# Altium PCB PCBmain.PcbDoc
Units mil, origin at the board's own origin, x right, y up, seen from the top; angles counter-clockwise.
Board outline 4165 x 1710 mil, 2 copper layers (Top Layer, Bottom Layer); 39 components, 34 nets, 220 pads, 0 vias.
Unrouted connection lines stored in the file: 106.
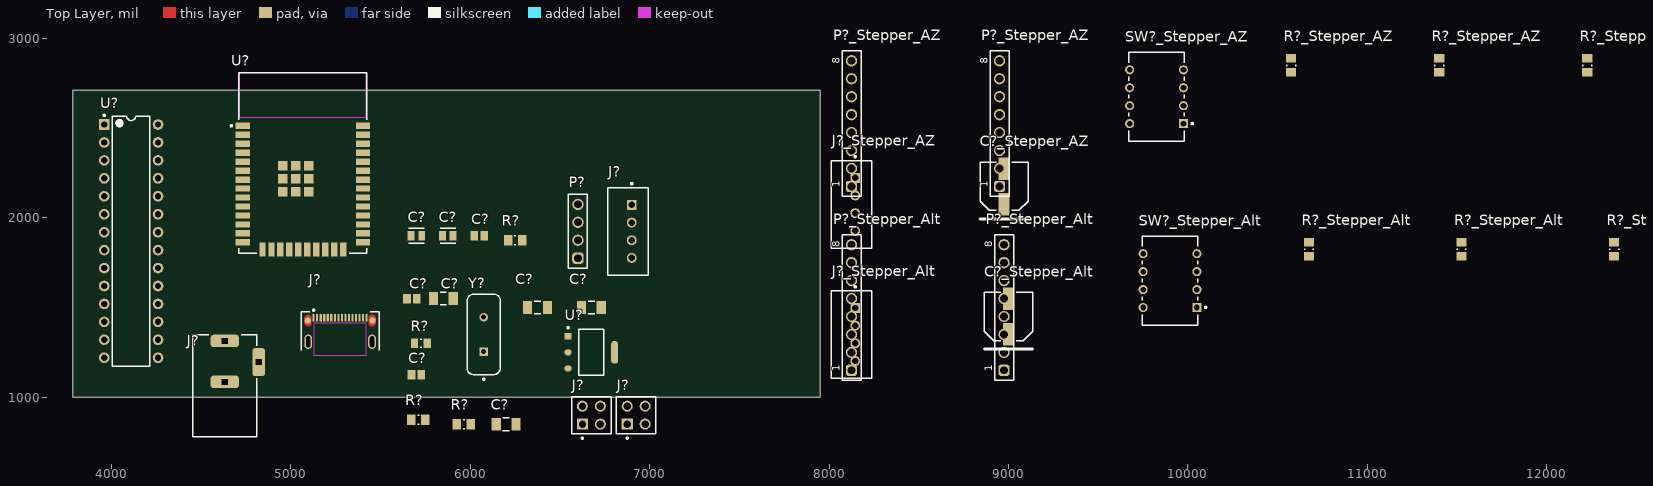
[diagram p0: Top Layer view]
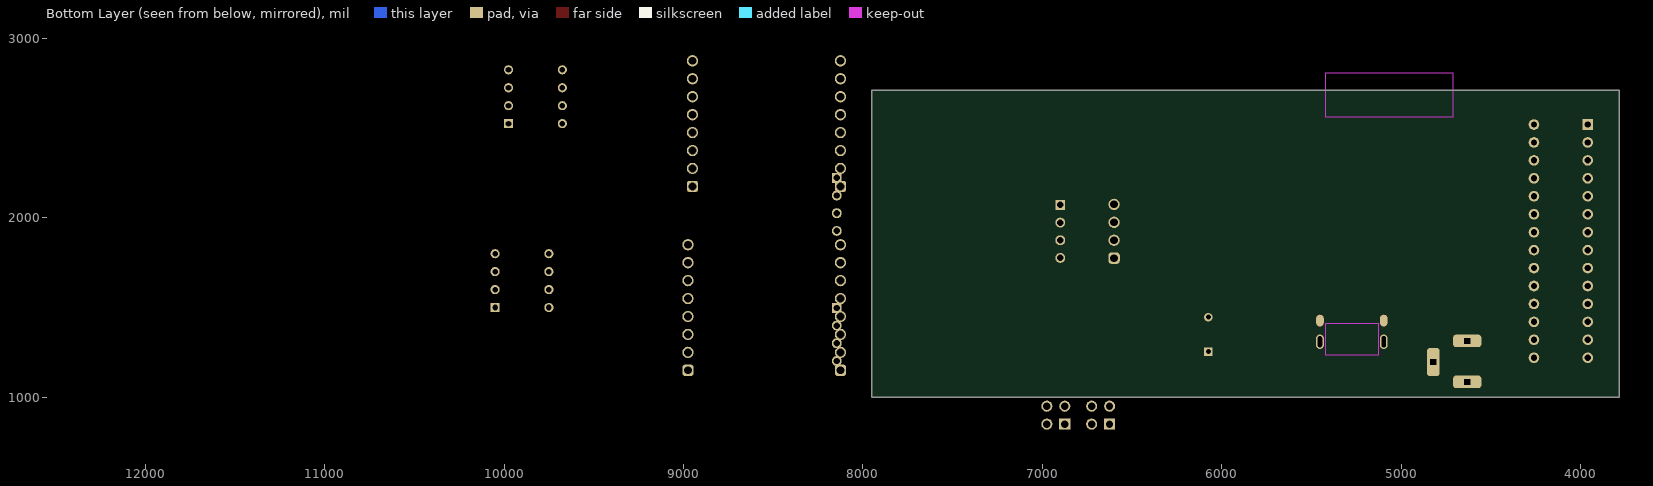
[diagram p1: Bottom Layer view, seen from below]

## Layer stack, top to bottom
Top Solder: solder mask 0.4, Solder Resist, Dk 3.5
Top Layer: signal copper 1.4
Dielectric 1: dielectric 12.6, FR-4, Dk 4.8
Bottom Layer: signal copper 1.4
Bottom Solder: solder mask 0.4, Solder Resist, Dk 3.5

## Board outline
3785,1000 7950,1000 7950,2710 3785,2710

## Design rules (kind name [scope] priority, off if disabled: settings)
BoardOutlineClearance [All] p1: gap=7.87 ignorepadtopadclearanceinfootprint=FALSE
Clearance [All] p1: gap=5 ignorepadtopadclearanceinfootprint=FALSE except(9.84: Arc-Hole Track-Hole SMDPad-Hole THPad-Hole Via-Hole Fill-Hole Poly-Hole Region-Hole Text-Hole)
ComponentClearance [All] p1: gap=5 collisioncheckmode=3 verticalgap=5 showdistances=TRUE
DiffPairsRouting [All] p1: maxlimit=10 minlimit=5 mostfreqgap=5 toplayer_minwidth=5 toplayer_maxwidth=1000 toplayer_prefwidth=5 bottomlayer_minwidth=5 bottomlayer_maxwidth=1000 bottomlayer_prefwidth=5 maxuncoupledlength=500
Height [All] p1: minheight=0 maxheight=71497.94 prefheight=500
HoleSize [All] p1: absolutevalues=TRUE maxlimit=248.03 minlimit=11.81 maxpercent=80.000 minpercent=20.000
HoleToHoleClearance [All] p1: gap=9.84 allowstackedmicrovias=FALSE
MinimumAnnularRing [All] p1: minimumring=3
MinimumSolderMaskSliver [All] p1: minsoldermaskwidth=0
PlaneClearance [All] p1: clearance=5
PlaneConnect PlaneConnectPowerPads [InPadClass('PowerPads')] p1: planeconnectstyle=Direct reliefexpansion=20 reliefentries=4 reliefconductorwidth=10 reliefairgap=10
PlaneConnect [All] p2: pad.planeconnectstyle=Relief pad.reliefexpansion=11.81 pad.reliefentries=4 pad.reliefconductorwidth=5 pad.reliefairgap=5 via.planeconnectstyle=Direct via.reliefexpansion=11.81 via.reliefentries=4 via.reliefconductorwidth=5 via.reliefairgap=5
PolygonConnect PolygonConnectPowerPads [All vs (InPadClass('PowerPads'))] p1: connectstyle=Direct reliefconductorwidth=10 reliefentries=4 polygonreliefangle="90 Angle" airgapwidth=10
PolygonConnect [All] p2: thpad.connectstyle=Relief thpad.reliefconductorwidth=5 thpad.reliefentries=4 thpad.polygonreliefangle="90 Angle" thpad.airgapwidth=5 smdpad.connectstyle=Relief smdpad.reliefconductorwidth=5 smdpad.reliefentries=4 smdpad.polygonreliefangle="90 Angle" smdpad.airgapwidth=5 via.connectstyle=Direct via.reliefconductorwidth=5 via.reliefentries=4 via.polygonreliefangle="90 Angle" via.airgapwidth=5
RoutingVias [All] p1: holewidth=11.81 width=23.62 viastyle="Through Hole" minholewidth=11.81 minwidth=23.62 maxholewidth=23.62 maxwidth=259.84
SilkToSilkClearance [All] p1: silktosilkclearance=0
SilkToSolderMaskClearance [IsPad] p1: minsilkscreentomaskgap=5 clearancetoexposedcopper=TRUE
SolderMaskExpansion [All] p1: expansion=2.95 istentingtop=FALSE
Width [All] p1: maxlimit=1000 minlimit=5 preferedwidth=5 minimp=50.000000 maximp=50.000000 favimp=50.000000
20 further rules are at their usual default settings.

## Classes and differential pairs
channel class Stepper_control: Stepper_Alt Stepper_AZ
component class Stepper_AZ: C?_Stepper_AZ J?_Stepper_AZ P?_Stepper_AZ R?_Stepper_AZ SW?_Stepper_AZ
component class Stepper_Alt: C?_Stepper_Alt J?_Stepper_Alt P?_Stepper_Alt R?_Stepper_Alt SW?_Stepper_Alt
component class Sensors: J? P?
component class Power: C? J? R? U?
component class Asynchronous: C? J? R? U?
component class Synchronous: C? R? U1 U? Y?

## Components (designator, comment, footprint, x,y, rotation, side; value= is the part's Value field where it differs from the comment)
C? "1206YD106KAT2A" FP-1206-L_3_2_0_2-W_1_6_0-IPC_B 6200,850 r0 top
C? "C0805C220K3GACTU" FP-C0805C-DN-MFG 5700,1900 r0 top value="22 pF"
C? "C0805C105K4PACTU" CAPC2013X145X50LL20T25 5700,1125 r0 top
C? "C0805C220K3GACTU" FP-C0805C-DN-MFG 5875,1900 r0 top value="22 pF"
C? "08055F104KAT2A" CAPC2013X140X50LL20T25 6050,1900 r0 top value=100nF
C? "1206YD106KAT2A" FP-1206-L_3_2_0_2-W_1_6_0-IPC_B 6375,1500 r0 top
C? "08055F104KAT2A" CAPC2013X140X50LL20T25 5675,1550 r0 top value=100nF
C? "1206YD106KAT2A" FP-1206-L_3_2_0_2-W_1_6_0-IPC_B 5850,1550 r0 top
C? "1206YD106KAT2A" FP-1206-L_3_2_0_2-W_1_6_0-IPC_B 6675,1500 r0 top
C?_Stepper_Alt "EEEFK1E101XP" PNSC-FK-V-D8_V 9000,1450 r90 top (schematic designator C?)
C?_Stepper_AZ "EEEFK1E101XP" PNSC-FK-V-D8_V 8975,2175 r90 top (schematic designator C?)
J? "B4B-XH-A(LF)(SN)" FP-B4B-XH-A_LF_SN-MFG 6879.33,1924.21 r90 top
J? "PEC02DABN" FP-PEC02DABN-MFG 6925,900 r0 top
J? "PEC02DABN" FP-PEC02DABN-MFG 6675,900 r0 top
J? "694106301002" 694106301002 4632.05,1064.09 r0 top
J? "213083-0005" FP-2130830005-MFG 5275,1303.35 r0 top
J?_Stepper_Alt "B4B-XH-A(LF)(SN)" FP-B4B-XH-A_LF_SN-MFG 8125,1350 r90 top (schematic designator J?)
J?_Stepper_AZ "B4B-XH-A(LF)(SN)" FP-B4B-XH-A_LF_SN-MFG 8125,2075 r90 top (schematic designator J?)
P? "61300411121" 61300411121 6600,1925 r90 top
P?_Stepper_Alt "61300811121" 61300811121 8975,1500 r90 top (schematic designator P?)
P?_Stepper_Alt "61300811121" 61300811121 8125,1500 r90 top (schematic designator P?)
P?_Stepper_AZ "61300811121" 61300811121 8125,2525 r90 top (schematic designator P?)
P?_Stepper_AZ "61300811121" 61300811121 8950,2525 r90 top (schematic designator P?)
R? "RC0805FR-0710KL" RESC2013X60X35NL10T20 5725,1300 r0 top
R? "RC0805FR-071KL" RESC2013X60X35ML10T20 5964.37,850 r0 top
R? "RC0805FR-071KL" RESC2013X60X35ML10T20 5710.63,875 r0 top
R? "RC0805FR-071KL" RESC2013X60X35ML10T20 6250,1875 r0 top
R?_Stepper_Alt "RC0805FR-071KL" RESC2013X60X35ML10T20 12375,1825 r90 top (schematic designator R?)
R?_Stepper_Alt "RC0805FR-071KL" RESC2013X60X35ML10T20 11525,1825 r90 top (schematic designator R?)
R?_Stepper_Alt "RC0805FR-071KL" RESC2013X60X35ML10T20 10675,1825 r90 top (schematic designator R?)
R?_Stepper_AZ "RC0805FR-071KL" RESC2013X60X35ML10T20 12225,2850 r90 top (schematic designator R?)
R?_Stepper_AZ "RC0805FR-071KL" RESC2013X60X35ML10T20 11400,2850 r90 top (schematic designator R?)
R?_Stepper_AZ "RC0805FR-071KL" RESC2013X60X35ML10T20 10575,2850 r90 top (schematic designator R?)
SW?_Stepper_Alt "1825360-3" FP-1825360-3-MFG 9900,1650 r90 top (schematic designator SW?)
SW?_Stepper_AZ "1825360-3" FP-1825360-3-MFG 9825,2675 r90 top (schematic designator SW?)
U? "AMS1117-3.3" FP-AMS1117-IPC_C 6675,1250 r0 top
U? "ATmega328P-PU" 28P3 4110,1870 r0 top
U? "ESP32-WROOM-32" FP-ESP32-WROOM-32-MFG 5067.13,2305.94 r0 top
Y? "FOXSLF/160-20" FOX-FOXSLF160-20 6075,1350 r90 top

## Footprints (in the part's own frame and the unit in brackets; to place one, negate y for a bottom-side part, rotate by r counter-clockwise, add the part's x,y. Pads: shape width x height; smd on the part's side, far side on the other; paste and mask are expansions set on the pad)
28P3 [mm] "28-Pin Plastic Dual In-Line Package (PDIP)"
  rect 1.5x1.5 hole 0.9: 1(-3.81,16.51)
  round 1.5 hole 0.9: 2(-3.81,13.97) 3(-3.81,11.43) 4(-3.81,8.89) 5(-3.81,6.35) 6(-3.81,3.81) 7(-3.81,1.27) 8(-3.81,-1.27) 9(-3.81,-3.81) 10(-3.81,-6.35) 11(-3.81,-8.89) 12(-3.81,-11.43) 13(-3.81,-13.97) 14(-3.81,-16.51) 15(3.81,-16.51) 16(3.81,-13.97) 17(3.81,-11.43) 18(3.81,-8.89) 19(3.81,-6.35) 20(3.81,-3.81) 21(3.81,-1.27) 22(3.81,1.27) 23(3.81,3.81) 24(3.81,6.35) 25(3.81,8.89) 26(3.81,11.43) 27(3.81,13.97) 28(3.81,16.51)
  silkscreen extent -3.93,-17.7 2.65,17.93, body extent -3.6,-17.65 3.6,17.65, height 4.58
61300411121 [mm] "Pin Header, pitch 2.54 mm, THT, Vertical, single row, 4p"
  rrect50% 1.6x1.6 hole 1.1: 1(-3.81,0)
  round 1.6 hole 1.1: 2(-1.27,0) 3(1.27,0) 4(3.81,0)
  silkscreen extent -5.23,-1.35 5.23,1.35, body extent -5.08,-1.27 5.08,1.27, height 8.57
61300811121 [mm] "Pin Header, pitch 2.54 mm, THT, Vertical, single row, 8p"
  rrect50% 1.6x1.6 hole 1.1: 1(-8.89,0)
  round 1.6 hole 1.1: 2(-6.35,0) 3(-3.81,0) 4(-1.27,0) 5(1.27,0) 6(3.81,0) 7(6.35,0) 8(8.89,0)
  silkscreen extent -10.31,-1.35 10.31,1.35, body extent -10.16,-1.27 10.16,1.27, height 8.57
694106301002 [mm] "DC Power Jack Right Angled(6.4)"
  rrect50% 4x1.8 hole 0.8 square: 1(0,6.35) 2(0,0.55)
  rrect50% 1.8x4 hole 0.8 square: 3(4.8,3.35)
  silkscreen extent -4.5,-7.25 4.5,7.25, body extent -4.5,-7.25 5,7.25, height 10.75
CAPC2013X140X50LL20T25 [mm] "Chip Capacitor, 2-Leads, Body 2.00x1.25mm, IPC High Density"
  rect 1.1x1.35 smd: 1(-0.7,0) 2(0.7,0)
  body extent -1.1,-0.72 1.1,0.72, height 1.4
CAPC2013X145X50LL20T25 [mm] "Chip Capacitor, 2-Leads, Body 2.00x1.25mm, IPC High Density"
  rect 1.1x1.35 smd: 1(-0.7,0) 2(0.7,0)
  body extent -1.1,-0.72 1.1,0.72, height 1.45
FOX-FOXSLF160-20 [mm] "THD, 2-Leads, Body 11.35x4.65mm"
  rect 1.2x1.2 hole 0.7: 1(-2.44,0)
  round 1.2 hole 0.7: 2(2.44,0)
  silkscreen extent -6.45,-2.32 5.68,2.32, body extent -5.67,-2.32 5.68,2.33, height 3.6
FP-1206-L_3_2_0_2-W_1_6_0-IPC_B [mil]
  rect 51.36x71.11 smd paste+0 mask+0: 1(-55.15,0) 2(55.15,0)
  silkscreen extent -18,-36 18,36, body extent -91,-45 91,45, height 10
FP-1825360-3-MFG [mm]
  rect 1.29x1.29 hole 0.79 paste-2539.97 mask+0: 1(-3.81,-3.81)
  round 1.29 hole 0.79 paste-2539.97 mask+0: 2(-1.27,-3.81) 3(1.27,-3.81) 4(3.81,-3.81) 5(3.81,3.81) 6(1.27,3.81) 7(-1.27,3.81) 8(-3.81,3.81)
  silkscreen extent -6.29,-5.16 6.29,3.9, body extent -6.4,-4.55 6.4,4.55, height 0.25
FP-2130830005-MFG [mm]
  round 0.9 smd paste-1000 mask+0: 1(-4.57,3.15) 2(4.57,3.15)
  rrect100% 1.1x1.65 smd far side paste-1000 mask+0: 1(-4.52,3.15) 2(4.52,3.15)
  rrect100% 1.1x2.05 hole 1.55 slot 0.6 at 0 deg paste-2539.97 mask+0: 3(-4.52,0.15) 4(4.52,0.15)
  rect 0.3x1 smd paste+0 mask+0: A1(-3.75,3.55) A4(-2.75,3.55) A5(-1.75,3.55) A6(-0.75,3.55) A7(0.75,3.55) A8(1.75,3.55) A9(2.75,3.55) A12(3.75,3.55) B1(3.25,3.55) B4(2.25,3.55) B5(1.25,3.55) B6(0.25,3.55) B7(-0.25,3.55) B8(-1.25,3.55) B9(-2.25,3.55) B12(-3.25,3.55)
  Top Layer region: 5.07,3.425 5.001,3.691 4.812,3.891 4.549,3.974 4.28,3.919 4.07,3.741 4.07,3.741 4.07,2.559 4.28,2.381 4.549,2.326 4.812,2.409 5.001,2.609 5.07,2.875 5.07,2.875
  Top Layer region: -5.07,3.425 -5.001,3.691 -4.812,3.891 -4.549,3.974 -4.28,3.919 -4.07,3.741 -4.07,3.741 -4.07,2.559 -4.28,2.381 -4.549,2.326 -4.812,2.409 -5.001,2.609 -5.07,2.875 -5.07,2.875
  Keep-Out Layer region: -3.7,-1.745 3.7,-1.745 3.7,2.755 -3.7,2.755
  silkscreen extent -5.53,-1.07 5.53,4.75, body extent -5.33,-4.18 5.33,4.18, height 0.25
FP-AMS1117-IPC_C [mm]
  rect 1.004x0.872 smd paste+0 mask+0: 1(-3.295,2.29)
  rrect100% 1.004x0.872 smd paste+0 mask+0: 2(-3.295,0) 3(-3.295,-2.29)
  rrect87% 1.004x3.182 smd paste+0 mask+0: 4(3.295,0)
  silkscreen extent -3.42,-3.25 1.75,3.62, body extent -3.9,-3.35 3.9,3.35, height 0.25
FP-B4B-XH-A_LF_SN-MFG [mm]
  rect 1.4x1.4 hole 0.9 paste-2539.97 mask+0: 1(3.75,-0.525)
  round 1.4 hole 0.9 paste-2539.97 mask+0: 2(1.25,-0.525) 3(-1.25,-0.525) 4(-3.75,-0.525)
  silkscreen extent -6.2,-2.88 6.87,2.88, body extent -6.3,-2.98 6.3,2.98, height 0.25
FP-C0805C-DN-MFG [mm]
  rect 0.95x1.35 smd paste+0 mask+0: 1(-0.75,0) 2(0.75,0)
  silkscreen extent -1.1,-1.07 1.1,1.07, body extent -1.4,-0.85 1.4,0.85, height 0.25
FP-ESP32-WROOM-32-MFG [mm]
  rect 2x0.9 smd paste+0 mask+0: 1(-8.5,5.26) 2(-8.5,3.99) 3(-8.5,2.72) 4(-8.5,1.45) 5(-8.5,0.18) 6(-8.5,-1.09) 7(-8.5,-2.36) 8(-8.5,-3.63) 9(-8.5,-4.9) 10(-8.5,-6.17) 11(-8.5,-7.44) 12(-8.5,-8.71) 13(-8.5,-9.98) 14(-8.5,-11.25) 25(8.5,-11.25) 26(8.5,-9.98) 27(8.5,-8.71) 28(8.5,-7.44) 29(8.5,-6.17) 30(8.5,-4.9) 31(8.5,-3.63) 32(8.5,-2.36) 33(8.5,-1.09) 34(8.5,0.18) 35(8.5,1.45) 36(8.5,2.72) 37(8.5,3.99) 38(8.5,5.26)
  rect 0.9x2 smd paste+0 mask+0: 15(-5.715,-12.25) 16(-4.445,-12.25) 17(-3.175,-12.25) 18(-1.905,-12.25) 19(-0.635,-12.25) 20(0.635,-12.25) 21(1.905,-12.25) 22(3.175,-12.25) 23(4.445,-12.25) 24(5.715,-12.25)
  rect 1.33x1.33 smd paste+0 mask+0: 39(-2.835,-4.075) 39(-2.835,-2.24) 39(-2.835,-0.405) 39(-1,-4.075) 39(-1,-2.24) 39(-1,-0.405) 39(0.835,-4.075) 39(0.835,-2.24) 39(0.835,-0.405)
  Keep-Out Layer region: -9,6.45 9,6.45 9,12.75 -9,12.75
  Keep-Out Layer region: -9,6.45 9,6.45 9,12.75 -9,12.75
  silkscreen extent -10.25,-12.8 9.05,12.8, body extent -9.6,-13.35 9.6,12.9, height 0.25
FP-PEC02DABN-MFG [mm]
  rect 1.57x1.57 hole 1.02 paste-2539.97 mask+0: 1(-1.27,-1.27)
  round 1.57 hole 1.02 paste-2539.97 mask+0: 2(-1.27,1.27) 3(1.27,-1.27) 4(1.27,1.27)
  silkscreen extent -2.8,-3.37 2.8,2.61, body extent -2.9,-2.71 2.9,2.71, height 0.25
PNSC-FK-V-D8_V [mm] "CAPAE, 2-Leads, Body 6.80x6.80mm"
  rect 3.2x1.6 smd: 1(-2.5,0) 2(2.5,0)
  silkscreen extent -4.6,-3.4 3.4,3.4, body extent -3.9,-3.4 3.9,3.4, height 8
RESC2013X60X35ML10T20 [mm] "Chip Resistor, 2-Leads, Body 2.1x1.35mm, IPC Low Density"
  rect 1.2x1.45 smd: 1(-1,0) 2(1,0)
  silkscreen extent -0.1,-0.63 0.1,0.63, body extent -1.05,-0.68 1.05,0.67, height 0.6
RESC2013X60X35NL10T20 [mm] "Chip Resistor, 2-Leads, Body 2.1x1.35mm, IPC Medium Density"
  rect 1x1.35 smd: 1(-0.9,0) 2(0.9,0)
  silkscreen extent -0.1,-0.58 0.1,0.58, body extent -1.05,-0.68 1.05,0.67, height 0.6

## Part data
C? C? C? C?: library part CMP-04427-000082-1, "General Purpose Ceramic Capacitor, 1206, 10uF, 10%, X5R, 15%, 16V", Capacitance=10uF, Case Code (Imperial)=1206, Case Code (Metric)=3216, Dielectric=X5R, Max Operating Temperature=85°C, Min Operating Temperature=-55°C, Package Quantity=1, Tolerance=10%, Voltage=16V, Case/Package=1206, Construction=Flat, Depth=1.6mm, Height=0.07mm, Lead Free="Lead Free", Length=3.2mm, Mount="Surface Mount", Number of Pins=2, Packaging="Tape and Reel", Radiation Hardening=No, REACH SVHC="No SVHC", RoHS Compliant=Yes, Series=-, Size=1.78mm, Termination=SMD/SMT, Thickness=0.07inch, Voltage Rating=16V, Voltage Rating (DC)=16V, Width=1.6mm
C? C?: library part CMP-2007-00528-2, "CAP CER 22PF 25V 10% NP0 0805", Capacitance="22 pF", Manufacturer=KEMET, Package=C0805C-DN, Temperature="-55°C to +125°C", Temperature Characteristic=C0G, Temperature Coefficient=30ppm/°C, Temperature Range High=+125°C, Temperature Range Low=-55°C, Tolerance=0.1, Voltage Rating="25 V", Automotive=No, Category=Cap, ComponentLink2Description=Datasheet, ComponentLink2URL=https://content.kemet.com/datasheets/KEM_C1003_C0G_SMD.pdf, Device Class L1="Passive Components", Device Class L2=Capacitors, Device Class L3="Ceramic Capacitors", Digikey Description="CAP CER 22PF 25V 10% NP0 0805", Height=0.88mm, Ipc Land Pattern Name=CAPC200125X78, Lead Free=Yes, Manufacturer Part Number=C0805C220K3GACTU, Material=Ceramic, Mouser Description="Multilayer Ceramic Capacitors MLCC - SMD/SMT 25volts 22pF C0G 10%", Octopart=https://octopart.com/c0805c220k3gactu-kemet-12580612, RoHS=TRUE
C?: library part CMP-1036-04746-2, Manufacturer=Kemet, Parameter 1=1uF, Part Number=C0805C105K4PACTU
C? C?: library part CMP-2007-04784-1, Manufacturer="AVX Interconnect / Elco", Part Number=08055F104KAT2A
C?_Stepper_Alt C?_Stepper_AZ: library part CMP-2000-06206-1, "Aluminum Electrolytic Capacitor, 100 uF, +/- 20%, 25 V, 2-Pin SMD (Size Code D8), -55 to 105 degC, RoHS, Tape and Reel", Capacitance=100µF, Case Size/Dimension=Ø6.3x7.7mm, Lifetime@Temperature=2000Hrs@105°C, Manufacturer=Panasonic, Operating Temp Range=-55to+105°C, Operating Temp-Max=105°C, Package Description="2-Pin Electrolytic Aluminum Capacitor, Body 6.6 x 6.6 mm", Package Reference=FK-V-D8, Rated Voltage=25V, Ripple Current=280mA, Datasheet URL=http://industrial.panasonic.com/cdbs/www-data/pdf/RDE0000/ABA0000C1181.pdf, Datasheet Version=03/2016, Impedance=0.34O, Manufacturer URL=http://www.panasonic.com/, Mounting Technology=SurfaceMount, Package URL=http://industrial.panasonic.com/cdbs/www-data/pdf/RDE0000/DME0000COL48.pdf, Series=FK, Type=Can
J? J?_Stepper_Alt J?_Stepper_AZ: library part CMP-17439-000250-1, "CONN HEADER VERT 4POS 2.5MM", Color=Natural, Contact Resistance=20mR, Current Rating=3A, Flammability Rating="UL94 V-0", Housing Color=White, Insulation Resistance=1GR, Max Operating Temperature=85°C, Max Voltage Rating (AC)=250V, Min Operating Temperature=-25°C, Package Quantity=500, Connector Type=Header, Contact Finish - Mating=TIN, Contact Material=Brass, Contact Plating=Tin, Contact Shape=Square, Contact Type="Male Pin", Depth=5.75mm, Fastening Type=Detent, Gender=Male, Housing Material=Polyamide, Insulation Color=Natural, Insulation Material=Nylon, Lead Free="Lead Free", Lead Pitch=2.5mm, Length=12.4mm, Mated Stacking Heights=9.8mm, Material=Polyamide, Max Current Rating=3A, Max Voltage Rating (DC)=250V, Mount="Through Hole", Number Of Contacts=4, Number of Positions=4, Number of Rows=1, Orientation=Straight, Packaging=Bulk, Pitch=2.5mm, REACH SVHC="No SVHC", Series=XH, Termination=Solder, Voltage Rating=250V, Voltage Rating (AC)=250V, Wire/Cable Gauge=22AWG
J? J?: library part CMP-25680-000069-1, "CONN HEADER VERT 4POS 2.54MM", Color=Black, Flammability Rating="UL94 V-0", Max Operating Temperature=125°C, Min Operating Temperature=-65°C, Package Quantity=1, Connector Type="Male Pin", Contact Finish - Mating=TIN, Contact Material=Bronze, Contact Mating Length=0.23inch, Contact Plating=Tin, Contact Shape=Square, Contact Type="Male Pin", Fastening Type=Pull, Gender=Male, Height=2.54mm, Housing Color=Black, Housing Material=Plastic, Insulation Color=Black, Insulation Material=PBT, Lead Free="Lead Free", Length=5.08mm, Mount="Through Hole", Number Of Contacts=4, Number of Positions=4, Number of Rows=2, Packaging=Bulk, Pitch=0.1inch, RoHS Compliant=Yes, Row Spacing=0.1inch, Series=-, Termination=Solder, Width=5.08mm
J?: library part CMP-1502-00188-2, Color=Black, Current Rating=5A, Flammability Rating="UL94 V-0", Insulation Resistance=100MΩ, Max Operating Temperature=85°C, Min Operating Temperature=-40°C, Operating Supply Voltage=24V, Voltage Rating (DC)=20V, Connector Type=Power, Contact Gender=Female, Contact Material="Gold, Tin", Contact Plating=Tin, Gender=Male, Height=11mm, Housing Material=Polyamide, Mount="Through Hole", NexarPartId=52676100, Number Of Contacts=3, Packaging=Bulk, REACH SVHC=Unknown, RoHS=Compliant, Shielding=Unshielded, Termination="Through Hole", Voltage Rating=24V
J?: library part CMP-04767-000030-2, "CONN RCP USB2.0 TYP C 24P SMD RA", Current Rating=5A, Max Operating Temperature=85°C, Min Operating Temperature=-40°C, Voltage Rating=30V, Contact Material="Gold, Nickel", Country of Origin=CN, Gender=Receptacle, NexarPartId=114105384, Number Of Contacts=16, Schedule B="8536695050, 8536695050", USB Standard="USB 2.0"
P?: library part CMP-1502-01064-2, Color=Black, Contact Resistance=20mΩ, Current Rating=3A, Max Operating Temperature=105°C, Min Operating Temperature=-40°C, Operating Supply Voltage=250V, Connector Type="Male Pin", Contact Material=Copper, Contact Mating Length=5.9944mm, Contact Plating=Gold, Gender=Male, Height=8.89mm, Lead Free="Lead Free", Lead Pitch=2.54mm, Mount="Through Hole", NexarPartId=32855522, Number Of Contacts=4, Number of Pins=4, Number of Positions=4, Number of Rows=1, Orientation=Vertical, Packaging=Bulk, Pitch=2.54mm, REACH SVHC=Unknown, RoHS=Compliant, Termination=Solder, Voltage Rating=250V
P?_Stepper_Alt P?_Stepper_Alt P?_Stepper_AZ P?_Stepper_AZ: library part CMP-1502-01076-2, Color=Black, Contact Resistance=20mΩ, Current Rating=3A, Max Operating Temperature=105°C, Min Operating Temperature=-40°C, Operating Supply Voltage=250V, Connector Type="Male Pin", Contact Material=Copper, Contact Mating Length=5.9944mm, Contact Plating=Gold, Gender=Male, Height=8.54mm, Lead Pitch=2.54mm, Mount="Through Hole", NexarPartId=32855533, Number Of Contacts=8, Number of Pins=8, Number of Positions=8, Number of Rows=1, Orientation=Vertical, Packaging=Bulk, Pitch=2.54mm, REACH SVHC=Unknown, RoHS=Compliant, Termination=Solder, Voltage Rating=250V
R?: library part CMP-1659-00013-4, "Chip Resistor, 10 KOhm, +/- 1%, 0.125 W, -55 to 155 degC, 0805 (2012 Metric), RoHS, Tape and Reel", Manufacturer=Yageo, Max Operating Temperature="155 degC", Min Operating Temperature="-55 degC", Package Quantity=5000, Voltage Rating="150 V", ComponentLink1Description="Manufacturer URL", ComponentLink1URL=http://www.yageo.com/, ComponentLink2Description=Datasheet, ComponentLink2URL=http://www.yageo.com/documents/recent/PYu-RC_Group_51_RoHS_L_04.pdf, DatasheetVersion="Rev. 4, 02/2016", Height="0.5 mm", Length="2 mm", Mount="Surface Mount", Mounting Technology="Surface Mount", PackageDescription="2-Pin Surface Mounted Device, Body 2 x 1.25 mm", PackageReference=0805, Packaging="Tape and Reel", Pins=2, REACH SVHC="No SVHC", RoHSCompliant=true
R? R? R? R?_Stepper_Alt R?_Stepper_Alt R?_Stepper_Alt R?_Stepper_AZ R?_Stepper_AZ R?_Stepper_AZ: library part CMP-2100-03671-1, "Chip Resistor, 1 KOhm, +/- 1%, 125 mW, -55 to 155 degC, 0805 (2012 Metric), RoHS, Tape and Reel", Case Code (Imperial)=0805, Case Code (Metric)=2012, Manufacturer=Yageo, Max Operating Temperature=155degC, Max Power Dissipation=125mW, Min Operating Temperature=-55degC, Package Description="2-Pin Surface Mounted Device, Body 2 x 1.25 mm", Package Quantity=1, Resistance=1KOhm, Temperature Coefficient=100ppm/degreesC, Tolerance=1%, Voltage Rating=150V, Case/Package=0805, Composition=ThickFilm, Datasheet URL=http://www.yageo.com/NewPortal/yageodocoutput?fileName=/pdf/R-Chip/PYu-RC_Group_51_RoHS_L_5.pdf, Datasheet Version="Rev. 5, 10/2016", Depth=1.25mm, Height=0.024inch, Lead Free=LeadFree, Length=0.079inch, Manufacturer URL=http://www.yageo.com/, Military Standard=Not, Number of Pins=2, Number of Terminations=2, Package Reference=0805, Packaging=TapeandReel, Power Rating=125mW, REACH SVHC=Unknown, RoHSCompliant=true, Termination=SMD/SMT, Voltage Rating (DC)=150V, Width=0.049inch
SW?_Stepper_Alt SW?_Stepper_AZ: library part CMP-03400-000022-1, "SWITCH SLIDE DIP SPST 100MA 24V", Contact Current Rating=1A, Contact Resistance=50mR, Flammability Rating="UL94 V-0", Housing Color=Black, Max Current Rating=100mA, Max Operating Temperature=85°C, Max Voltage Rating (DC)=24V, Min Operating Temperature=-30°C, Package Quantity=35, Voltage Rating (DC)=5V, Actuator Length=0.99mm, Actuator Material=Polybutylene, Actuator Type=Standard, Contact Material="Copper Alloy", Contact Plating=Gold, Contact Post Length=4mm, Depth=7.49mm, Electrical Life=1000Cycles, ELV=Compliant, Height=0.138inch, Housing Material=Polyphenylene, Lead Free="Lead Free", Length=0.476inch, Mount="Through Hole", Number of Circuits=4, Number of Positions=4, Orientation=Straight, Packaging=Rail/Tube, Pitch=0.1inch, Radiation Hardening=No, RoHS Compliant=Yes, Sealable="No (Without)", Series=ADE, Terminal Pitch=2.54mm, Termination="PC Pins", Throw Configuration=SPST, Type=Switch, Washable=Yes
U?: library part CMP-209535-000001-1, "LDO Voltage Regulators 1A, 3.3V", Dropout Voltage=1.1V, Manufacturer="Advanced Monolithic Systems", Max Junction Temp=+125°C, Max Power Dissipation=1.2W, Max Supply Voltage=15V, Nominal Supply Current=5mA, Output Current=1A, Output Voltage=3.3V, Package=AMS1117, Temperature="-40°C to +125°C", Temperature Range Low=-40°C, Automotive=No, Category=IC, ComponentLink2Description=Datasheet, ComponentLink2URL=http://www.advanced-monolithic.com/pdf/ds1117.pdf, Device Class L1="Integrated Circuits (ICs)", Device Class L2="Power Management ICs", Device Class L3="Voltage Regulators - Linear", Height=1.8mm, Ipc Land Pattern Name=SOT229P700X180-4, Lead Free=Yes, Manufacturer Part Number=AMS1117-3.3, Number Of Outputs=1, Octopart=https://octopart.com/ams1117-3.3-advanced+monolithic+systems-25899300, Output Type=Fixed, RoHS=TRUE, Standoff Height=0.64mm, Temperature Range High=+125°C
U?: library part CMP-0095-00013-2, "8-bit AVR Microcontroller, 32KB Flash, 1KB EEPROM, 2KB SRAM, 28-pin PDIP, Industrial Grade (-40°C to 85°C)", ComponentLink1Description="Manufacturer URL", ComponentLink1URL=http://www.atmel.com/, ComponentLink2Description="ATmega48A/48PA/88A/88PA/168A/168PA/328/328P Datasheet", ComponentLink2URL=http://www.atmel.com/dyn/resources/prod_documents/8271.pdf, ComponentLink3Description="ATmega48A/48PA/88A/88PA/168A/168PA/328/328P Summary", ComponentLink3URL=http://www.atmel.com/dyn/resources/prod_documents/8271S.pdf, DatasheetVersion="revD, May-2011", PackageDescription="28-lead (0.300\"/7.62mm Wide) Plastic Dual Inline Package (PDIP)", PackageReference=28P3, PackageVersion="revB, Sep-2001", RevisionNote="DatasheetVersion updated. URLs added."
U?: library part CMP-194065-000008-1, "RX TXRX MOD WIFI SURFACE MOUNT", Case/Package=SMD/SMT, Frequency=2.5GHz, Max Operating Temperature=85°C, Min Operating Temperature=-40°C, Operating Supply Voltage=3.6V, Package Quantity=550, Data Rate=150Mbps, Mount="Surface Mount", Packaging="Cut Tape", Sensitivity=-98dBm, Weight=0.088185oz
Y?: library part CMP-1749-00003-1, "Resistance Weld Thru-Hole Crystal, 16 MHz, -20 to 70 degC, 2-Pin THD, RoHS, Bulk", Case\Package=Axial, Max Operating Temperature="155 degC", Min Operating Temperature="-55 degC", Package Quantity=200, Power Rating="250 mW", Resistance="221 kohm", Tolerance=1%, Voltage Rating="250 V", ComponentLink1Description="Manufacturer URL", ComponentLink1URL=http://www.foxonline.com/, ComponentLink2Description=Datasheet, ComponentLink2URL=http://www.foxonline.com/pdfs/hc49slf.pdf, DatasheetVersion=Mar-15, Length="0.248 inch", Mount="Through Hole", PackageDescription="2-Pin Through Hole Device, Body 11.35 x 4.65 mm", PackageReference=FOXSLF160-20, Packaging=Bulk, RoHSCompliant=true

## Nets (pads, with @x,y where several pads share a name; then routed paths per layer and width w, separated by ;. In a path a pad name is that pad's centre, name@x,y a point inside that pad or via, vN(x,y) a via of type N, cw(c..) or ccw(c..) an arc to the next point about the centre after c; other vN are vias at no path point)
3V3: C?.1@5794.85,1550 C?.2@5702.56,1550 J?.1@6875,850 R?.2@5760.43,1300 U?.2@4732.48,2463.03
+5: C?.1@6144.85,850 C?.1@6319.85,1500 J?.1@6900,2071.85 J?.A4 J?.A9 J?.B4 J?.B9 P?.4 P?_Stepper_Alt.2@8975,1250 P?_Stepper_AZ.2@8950,2275 R?.2@6289.37,1875 SW?_Stepper_Alt.1 SW?_Stepper_Alt.2 SW?_Stepper_Alt.3 SW?_Stepper_AZ.1 SW?_Stepper_AZ.2 SW?_Stepper_AZ.3 U?.3@6545.28,1159.84 U?.7@3960,1920
+12: C?_Stepper_Alt.1 C?_Stepper_AZ.1 J?.1@4632.05,1314.09 P?_Stepper_Alt.8@8975,1850 P?_Stepper_AZ.8@8950,2875
GND: C?.1@5647.44,1550 C?.1@5672.44,1125 C?.1@6022.44,1900 C?.2@5729.53,1900 C?.2@5904.53,1900 C?.2@5905.15,1550 C?.2@6255.15,850 C?.2@6430.15,1500 C?.2@6730.15,1500 C?_Stepper_Alt.2 C?_Stepper_AZ.2 J?.2@4632.05,1085.75 J?.2@6900,1973.43 J?.3@4821.02,1195.98 J?.3@6975,850 J?.A1 J?.A12 J?.B1 J?.B12 P?.1 P?_Stepper_Alt.1@8975,1150 P?_Stepper_Alt.7@8975,1750 P?_Stepper_AZ.1@8950,2175 P?_Stepper_AZ.7@8950,2775 R?.2@5750,875 R?_Stepper_Alt.2 R?_Stepper_AZ.2 U?.1@4732.48,2513.03 U?.8@3960,1820 U?.15@4842.13,1823.66 U?.22@4260,1920 U?.38 U?.39
NetC?_1: C?.1@5670.47,1900 U?.10@3960,1620 Y?.1
NetC?_2: C?.2@6077.56,1900 U?.21@4260,1820
NetJ?_3: J?.3@6900,1875 U?.28@4260,2520
NetJ?_4: J?.4@6900,1776.57 U?.27@4260,2420
NetJ?_Stepper_Alt_1: J?_Stepper_Alt.1 P?_Stepper_Alt.3@8975,1350
NetJ?_Stepper_Alt_2: J?_Stepper_Alt.2 P?_Stepper_Alt.4@8975,1450
NetJ?_Stepper_Alt_3: J?_Stepper_Alt.3 P?_Stepper_Alt.5@8975,1550
NetJ?_Stepper_Alt_4: J?_Stepper_Alt.4 P?_Stepper_Alt.6@8975,1650
NetJ?_Stepper_AZ_1: J?_Stepper_AZ.1 P?_Stepper_AZ.3@8950,2375
NetJ?_Stepper_AZ_2: J?_Stepper_AZ.2 P?_Stepper_AZ.4@8950,2475
NetJ?_Stepper_AZ_3: J?_Stepper_AZ.3 P?_Stepper_AZ.5@8950,2575
NetJ?_Stepper_AZ_4: J?_Stepper_AZ.4 P?_Stepper_AZ.6@8950,2675
NetP?_2: P?.2 U?.5@3960,2120
NetP?_3: P?.3 U?.6@3960,2020
NetP?_Stepper_Alt_2: P?_Stepper_Alt.2@8125,1250 R?_Stepper_Alt.1@10675,1785.63 SW?_Stepper_Alt.8
NetP?_Stepper_Alt_3: P?_Stepper_Alt.3@8125,1350 R?_Stepper_Alt.1@11525,1785.63 SW?_Stepper_Alt.7
NetP?_Stepper_Alt_4: P?_Stepper_Alt.4@8125,1450 R?_Stepper_Alt.1@12375,1785.63 SW?_Stepper_Alt.6
NetP?_Stepper_Alt_5: P?_Stepper_Alt.5@8125,1550 P?_Stepper_Alt.6@8125,1650
NetP?_Stepper_Alt_7: P?_Stepper_Alt.7@8125,1750
NetP?_Stepper_Alt_8: P?_Stepper_Alt.8@8125,1850
NetP?_Stepper_AZ_2: P?_Stepper_AZ.2@8125,2275 R?_Stepper_AZ.1@10575,2810.63 SW?_Stepper_AZ.8
NetP?_Stepper_AZ_3: P?_Stepper_AZ.3@8125,2375 R?_Stepper_AZ.1@11400,2810.63 SW?_Stepper_AZ.7
NetP?_Stepper_AZ_4: P?_Stepper_AZ.4@8125,2475 R?_Stepper_AZ.1@12225,2810.63 SW?_Stepper_AZ.6
NetP?_Stepper_AZ_5: P?_Stepper_AZ.5@8125,2575 P?_Stepper_AZ.6@8125,2675
NetP?_Stepper_AZ_7: P?_Stepper_AZ.7@8125,2775
NetP?_Stepper_AZ_8: P?_Stepper_AZ.8@8125,2875
NetR?_1: R?.1@6210.63,1875 U?.1@3960,2520
NetR?_2: R?.2@6003.74,850 U?.2@6545.28,1250 U?.4@6804.72,1250
RX_channel: J?.4@6725,950 U?.2@3960,2420 U?.35
RX_ESP: J?.2@6625,950 U?.3@3960,2320 U?.34
pads on no net: C?.1@5845.47,1900 C?.1@6619.85,1500 C?.2@5727.56,1125 J?.1@5095.08,1427.36 J?.1@5097.05,1427.36 J?.1@6625,850 J?.2@5452.95,1427.36 J?.2@5454.92,1427.36 J?.2@6875,950 J?.3@5097.05,1309.25 J?.3@6725,850 J?.4@5452.95,1309.25 J?.4@6975,950 J?.A5 J?.A6 J?.A7 J?.A8 J?.B5 J?.B6 J?.B7 J?.B8 P?_Stepper_Alt.1@8125,1150 P?_Stepper_AZ.1@8125,2175 R?.1@5671.26,875 R?.1@5689.57,1300 R?.1@5925,850 SW?_Stepper_Alt.4 SW?_Stepper_Alt.5 SW?_Stepper_AZ.4 SW?_Stepper_AZ.5 U?.1@6545.28,1340.16 U?.3@4732.48,2413.03 U?.4@3960,2220 U?.4@4732.48,2363.03 U?.5@4732.48,2313.03 U?.6@4732.48,2263.03 U?.7@4732.48,2213.03 U?.8@4732.48,2163.03 U?.9 U?.10@4732.48,2063.03 U?.11 U?.12 U?.13 U?.14 U?.15@4260,1220 U?.16 U?.17 U?.18 U?.19 U?.20 U?.21@5142.13,1823.66 U?.22@5192.13,1823.66 U?.23 U?.24 U?.25 U?.26 U?.27@5401.77,1963.03 U?.28@5401.77,2013.03 U?.29 U?.30 U?.31 U?.32 U?.33 U?.36 U?.37 Y?.2

## Text inside footprints (layer, text, board x,y; h text height)
P?_Stepper_Alt: Top Overlay "1" at 8058.07,1145.28 h40 r90; Top Overlay "8" at 8058.07,1835.04 h40 r90
P?_Stepper_Alt: Top Overlay "1" at 8908.07,1145.28 h40 r90; Top Overlay "8" at 8908.07,1835.04 h40 r90
P?_Stepper_AZ: Top Overlay "1" at 8883.07,2170.28 h40 r90; Top Overlay "8" at 8883.07,2860.04 h40 r90
P?_Stepper_AZ: Top Overlay "1" at 8058.07,2170.28 h40 r90; Top Overlay "8" at 8058.07,2860.04 h40 r90